# Altium PCB PCB.PcbDoc
Units mil, origin at the board's own origin, x right, y up, seen from the top; angles counter-clockwise.
Board outline 1653.54 x 1653.54 mil, 2 copper layers (Top Layer, Bottom Layer); 43 components, 40 nets, 181 pads, 31 vias.
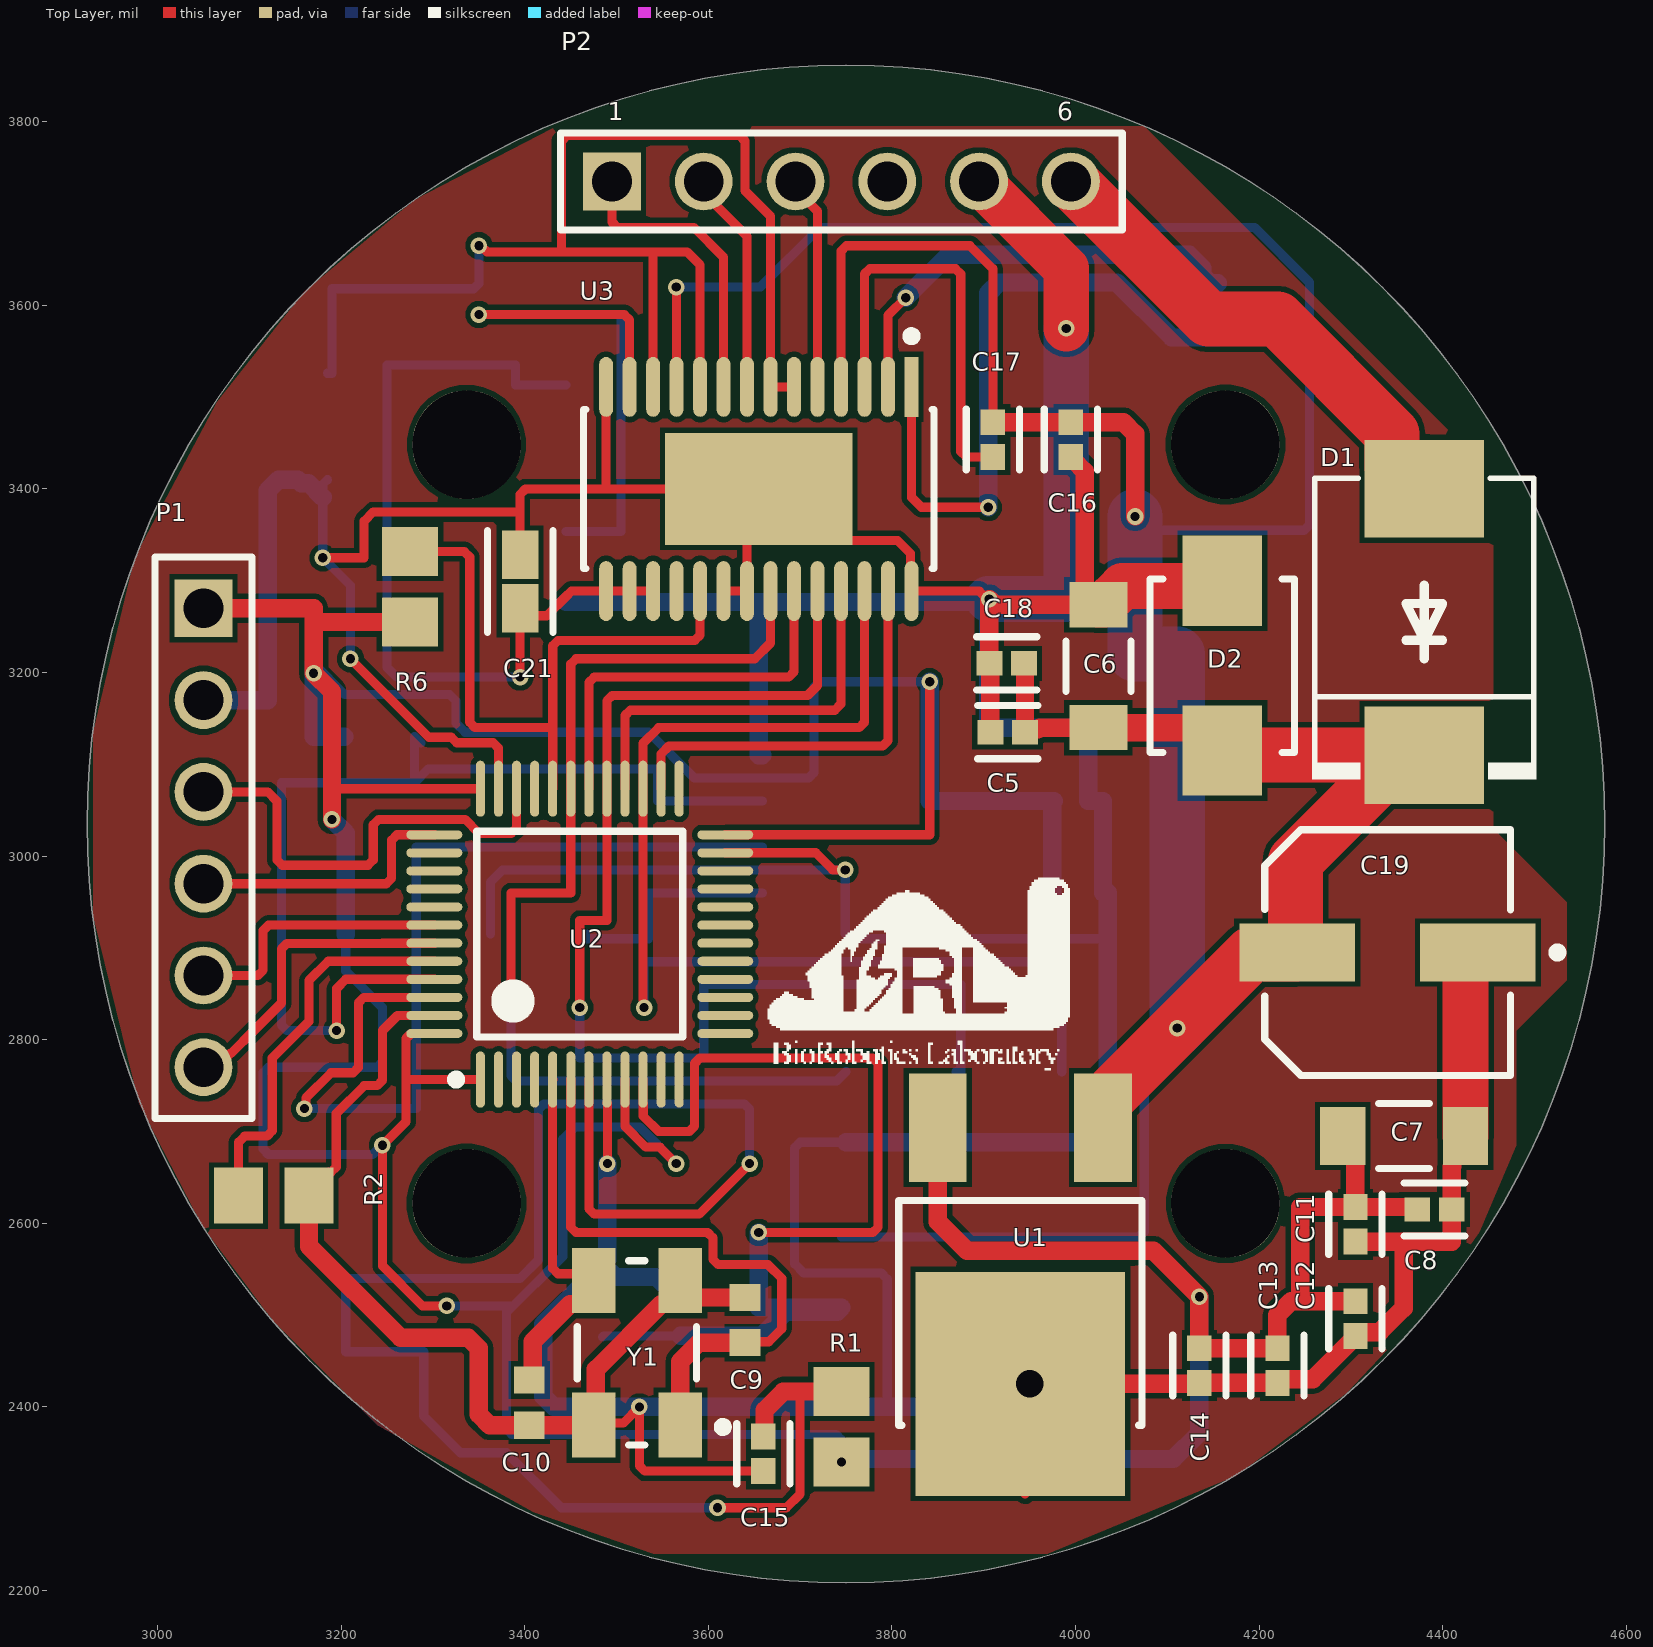
[diagram p0: Top Layer view]
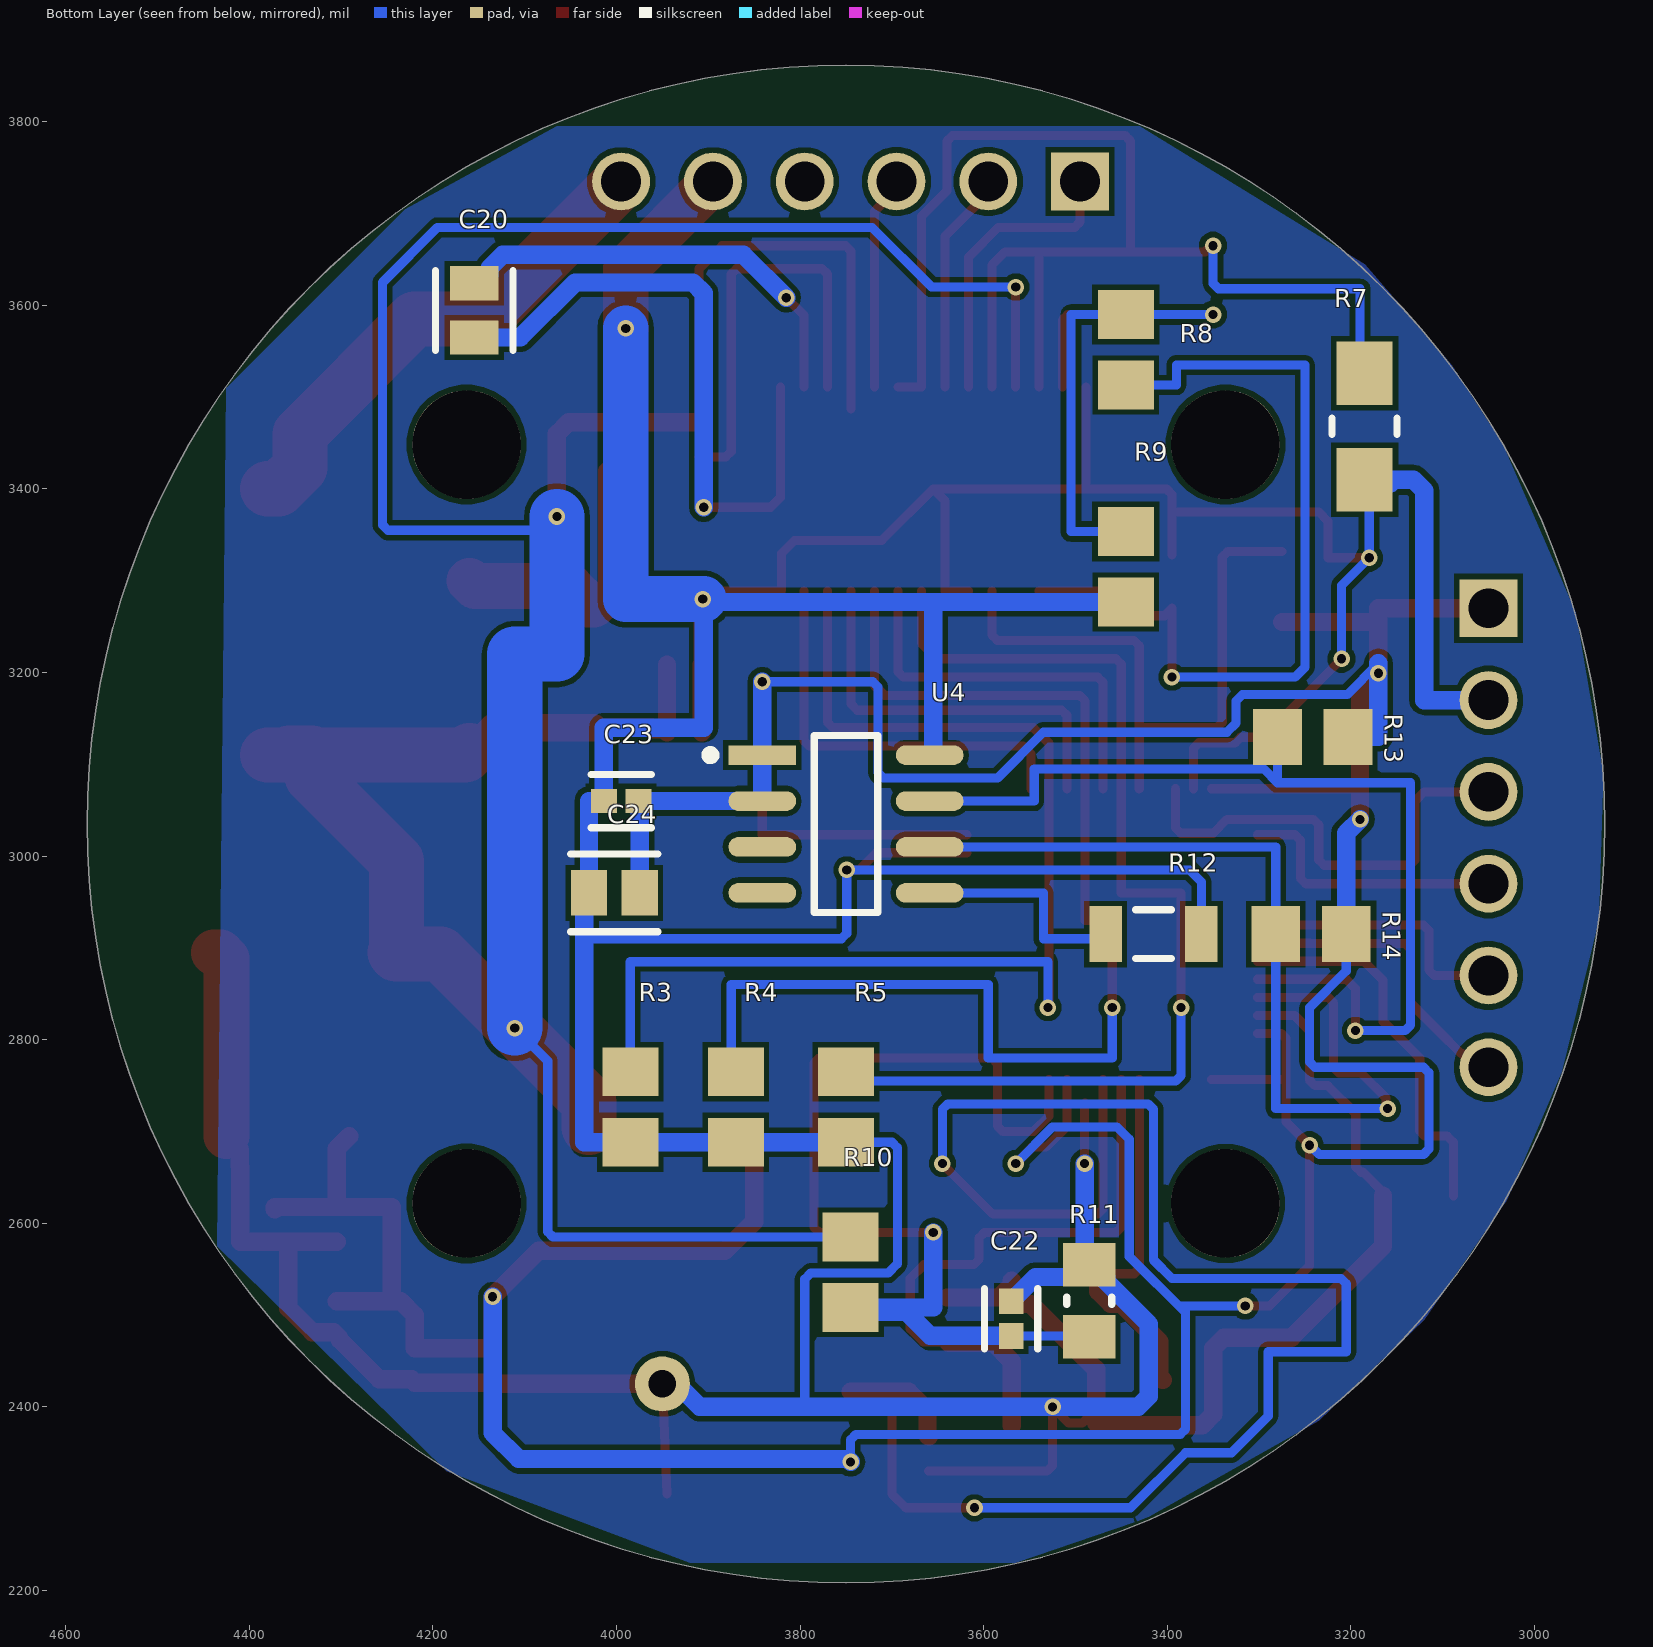
[diagram p1: Bottom Layer view, seen from below]
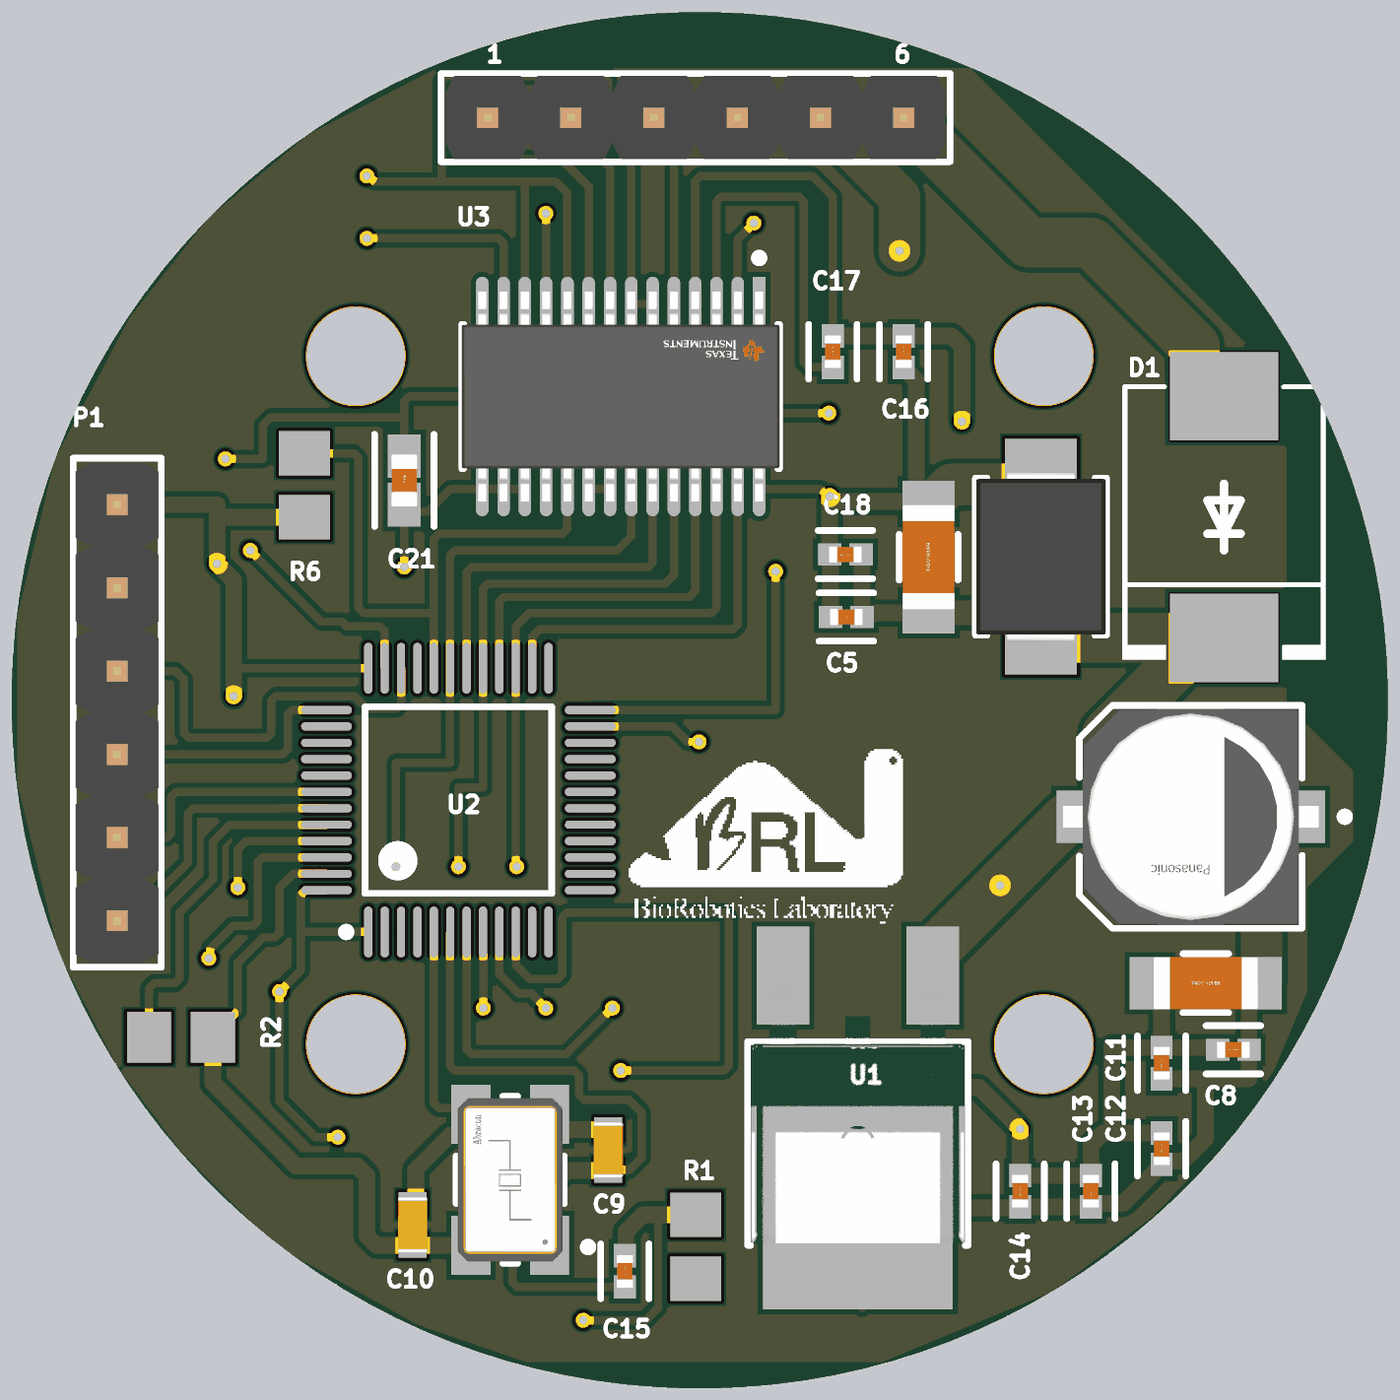
[diagram p2: 3D render of the assembled board from above, using the file's embedded part models]

## Layer stack, top to bottom
Top Solder: solder mask 0.4, Solder Resist, Dk 3.5
Top Layer: signal copper 1.4
Dielectric 1: dielectric 12.6, FR-4, Dk 4.8
Bottom Layer: signal copper 1.4
Bottom Solder: solder mask 0.4, Solder Resist, Dk 3.5

## Board outline
2923.23,3035 ccw(c3750,3035) 3750,2208.23 ccw(c3750,3035) 4576.77,3035 ccw(c3750,3035) 3750,3861.77 ccw(c3750,3035)

## Design rules (kind name [scope] priority, off if disabled: settings)
Clearance [All] p1: gap=6 ignorepadtopadclearanceinfootprint=FALSE
HoleSize [All] p1: absolutevalues=TRUE maxlimit=1000 minlimit=1 maxpercent=80.000 minpercent=20.000
HoleToHoleClearance [All] p1: gap=0 allowstackedmicrovias=TRUE
MinimumSolderMaskSliver [All] p1: minsoldermaskwidth=0
PolygonConnect [All] p1: connectstyle=Relief reliefconductorwidth=10 reliefentries=4 polygonreliefangle="90 Angle" airgapwidth=10
RoutingVias [All] p1: holewidth=28 width=50 viastyle="Through Hole" minholewidth=28 minwidth=50 maxholewidth=28 maxwidth=50
SilkToSilkClearance [All] p1: silktosilkclearance=0
SilkToSolderMaskClearance [IsPad] p1: minsilkscreentomaskgap=0 clearancetoexposedcopper=TRUE
SolderMaskExpansion [All] p1: expansion=4 istentingtop=FALSE
Width [All] p1: maxlimit=100 minlimit=5 preferedwidth=10
25 further rules are at their usual default settings.

## Classes and differential pairs
component class SENSOR: C22 C23 C24 R10 R11 R12 R13 R14 U4
component class PORT: P1 P2
component class MCU: C9 C10 C11 C12 C13 C14 C15 R1 R2 U2 Y1
component class DRIVE: C16 C17 C18 C19 C20 C21 R3 R4 R5 R6 R7 R8 R9 U3
component class POWER: C5 C6 C7 C8 D1 D2 U1

## Components (designator, comment, footprint, x,y, rotation, side; value= is the part's Value field where it differs from the comment)
C5 "100nF 35V 10%" FP-0402-L_1_0_0_05-W_0_5-IPC_A 3926.16,3135 r180 top
C6 "10uF 35V 10%" FP-1206-L_3_2_0_2-W_1_6_0-MFG 4025,3206.93 r90 top
C7 "10uF 35V 10%" FP-1206-L_3_2_0_2-W_1_6_0-MFG 4358.07,2695 r0 top
C8 "100nF 35V 10%" FP-0402-L_1_0_0_05-W_0_5-IPC_A 4391.16,2615 r0 top
C9 "20pF 50V" CAPC1608X90X30LL10T20 3640,2494.61 r270 top
C10 "20pF 50V" CAPC1608X90X30LL10T20 3405,2404.61 r90 top
C11 "100nF 35V 10%" FP-0402-L_1_0_0_05-W_0_5-IPC_A 4305,2598.84 r270 top
C12 "100nF 35V 10%" FP-0402-L_1_0_0_05-W_0_5-IPC_A 4305,2496.16 r270 top
C13 "100nF 35V 10%" FP-0402-L_1_0_0_05-W_0_5-IPC_A 4220,2445 r270 top
C14 "100nF 35V 10%" FP-0402-L_1_0_0_05-W_0_5-IPC_A 4135,2445 r270 top
C15 "100nF 35V 10%" FP-0402-L_1_0_0_05-W_0_5-IPC_A 3660,2348.84 r270 top
C16 "100nF 35V 10%" FP-0402-L_1_0_0_05-W_0_5-IPC_A 3995,3453.84 r90 top
C17 "100nF 35V 10%" FP-0402-L_1_0_0_05-W_0_5-IPC_A 3910,3453.84 r90 top
C18 "100nF 35V 10%" FP-0402-L_1_0_0_05-W_0_5-IPC_A 3925,3210 r180 top
C19 "100uF 35V 20%" FP-FTD-MFG 4340,2895 r180 top
C20 "0.01uF 50V 5%" FP-C0805C-DN-MFG 4155,3594.53 r270 bottom value="10,000 pF"
C21 "0.47uF 50V 10%" FP-C1608-080-0_1-IPC_A 3395,3299.15 r270 top
C22 "100nF 35V 10%" FP-0402-L_1_0_0_05-W_0_5-IPC_A 3570,2496.16 r90 bottom
C23 "100nF 35V 10%" FP-0402-L_1_0_0_05-W_0_5-IPC_A 3995,3060 r0 bottom
C24 "1uF 35V 10%" FP-0805-L_2_0_0_1-W_1_25-IPC_C 4002.35,2960 r0 bottom
D1 "SS54C" SMC_L6.9-W5.9-LS7.9-RD 4380,3255.13 r90 top
D2 "SMBJ40CA" FAIR-DO-214AA-A-2_V 4160,3207.52 r90 top
P1 "61300611121" 61300611121 3050,3020 r270 top locked
P2 "61300611121" 61300611121 3745,3735 r0 top locked
R1 "10k 1%" RESC2013X70X40ML20T20 3745,2378.39 r270 top
R2 "10k 1%" RESC2013X70X40ML20T20 3126.61,2630 r0 top
R3 "10k 1%" RESC2013X70X40ML20T20 3985,2726.61 r270 bottom
R4 "10k 1%" RESC2013X70X40ML20T20 3870,2726.61 r270 bottom
R5 "10k 1%" RESC2013X70X40ML20T20 3750,2726.61 r270 bottom
R6 "10k 1%" RESC2013X70X40ML20T20 3275,3293.39 r270 top
R7 "0.1 Ohm 1%" FP-ERJ8BW-MFG 3185,3468.07 r90 bottom
R8 "10k 1%" RESC2013X70X40ML20T20 3445,3551.61 r90 bottom
R9 "10k 1%" RESC2013X70X40ML20T20 3445,3315.27 r90 bottom
R10 "10k 1%" RESC2013X70X40ML20T20 3745,2546.61 r90 bottom
R11 "1k Ohm 1%" RESC2013X60X35ML10T20 3485,2515.63 r90 bottom
R12 "1k 1%" RESC3216X70X50LL05T20 3415,2915 r0 bottom
R13 "10k 1%" RESC2013X70X40ML20T20 3241.61,3130 r0 bottom
R14 "10k 1%" RESC2013X70X40ML20T20 3243.39,2915 r0 bottom
U1 "NCV4274ADT33RKG" FP-369C-MFG 3940,2534.84 r180 top
U2 "STM32F103C8T6" STM-LQFP48_L 3460,2915 r90 top
U3 "DRV8313PWPR" FP-PWP0028C-IPC_B 3655,3400 r270 top
U4 "AS5600-ASOM" FP-AS5600-ASOM-IPC_C 3750,3035 r180 bottom
Y1 "12MHZ 10PF 10PPM" FP-ABM3B-MFG 3522.24,2458.74 r90 top

## Footprints (in the part's own frame and the unit in brackets; to place one, negate y for a bottom-side part, rotate by r counter-clockwise, add the part's x,y. Pads: shape width x height; smd on the part's side, far side on the other; paste and mask are expansions set on the pad)
61300611121 [mm] "Pin Header, pitch 2.54 mm, THT, Vertical, single row, 6p"
  rect 1.6x1.6 hole 1.1: 1(-6.35,0)
  round 1.6 hole 1.1: 2(-3.81,0) 3(-1.27,0) 4(1.27,0) 5(3.81,0) 6(6.35,0)
  silkscreen extent -7.77,-1.35 7.77,1.35, body extent -7.62,-1.27 7.62,1.27, height 8.57
CAPC1608X90X30LL10T20 [mm] "Chip Capacitor, 2-Leads, Body 1.70x0.90mm, IPC High Density"
  rect 0.75x0.85 smd: 1(-0.625,0) 2(0.625,0)
  body extent -0.85,-0.45 0.85,0.45, height 0.9
FAIR-DO-214AA-A-2_V [mm] "Molded Diode, 2-Leads, Body 4.75x3.95mm"
  rect 2.5x2.2 smd: 1(-2.35,0) 2(2.35,0)
  silkscreen extent -2.4,-2 2.4,2, body extent -2.59,-1.97 2.6,1.98, height 2.65
FP-369C-MFG [mm]
  rect 1.6x3 smd paste+0 mask+0: 1(-2.285,-4.3) 3(2.285,-4.3)
  rect 5.8x6.2 smd paste+0 mask+0: 4(0,2.79)
  silkscreen extent -3.36,-2.28 3.36,3.94, body extent -3.46,-5.9 3.46,5.99, height 0.25
FP-0402-L_1_0_0_05-W_0_5-IPC_A [mil]
  rect 28.16x26.48 smd paste+0 mask+0: 1(-18.84,0) 2(18.84,0)
  silkscreen extent -33,-29 33,29, body extent -41,-21 41,21, height 10
FP-0805-L_2_0_0_1-W_1_25-IPC_C [mil]
  rect 39.68x49.69 smd paste+0 mask+0: 1(-27.64,0) 2(27.65,0)
  silkscreen extent -47,-42 47,42, body extent -39,-25 39,25, height 53
FP-1206-L_3_2_0_2-W_1_6_0-MFG [mm]
  rect 1.25x1.6 smd paste+0 mask+0: 1(-1.7,0) 2(1.7,0)
  silkscreen extent -0.7,-0.9 0.7,0.9, body extent -2.42,-1 2.42,1, height 0.25
FP-ABM3B-MFG [mm]
  rect 1.8x1.2 smd paste+0 mask+0: 1(-2,-1.2) 2(2,-1.2) 3(2,1.2) 4(-2,1.2)
  silkscreen extent -2.55,-2.5 2.55,1.65, body extent -3,-1.9 3,1.9, height 0.25
FP-AS5600-ASOM-IPC_C [mil]
  rect 73.78x21.34 smd paste+0 mask+0: 1(-91.18,75)
  rrect100% 73.78x21.34 smd paste+0 mask+0: 2(-91.18,25) 3(-91.18,-25) 4(-91.18,-75) 5(91.18,-75) 6(91.18,-25) 7(91.18,25) 8(91.18,75)
  silkscreen extent -153,-96 35,96
FP-C0805C-DN-MFG [mm]
  rect 0.95x1.35 smd paste+0 mask+0: 1(-0.75,0) 2(0.75,0)
  silkscreen extent -1.1,-1.07 1.1,1.07, body extent -1,-0.63 1,0.63, height 0.88
FP-C1608-080-0_1-IPC_A [mil]
  rect 52.4x39.85 smd paste+0 mask+0: 1(-29.15,0) 2(29.15,0)
  silkscreen extent -55,-36 55,36, body extent -75,-40 75,40, height 10
FP-ERJ8BW-MFG [mm]
  rect 1.75x1.55 smd paste+0 mask+0: 1(-1.475,0) 2(1.475,0)
  silkscreen extent -0.23,-0.9 0.23,0.9, body extent -1.6,-0.8 1.6,0.8, height 0.75
FP-FTD-MFG [mm]
  rect 3.2x1.6 smd paste+0 mask+0: 1(-2.5,0) 2(2.5,0)
  silkscreen extent -4.82,-3.4 3.4,3.4, body extent -4.35,-3.65 4.35,3.65, height 0.25
FP-PWP0028C-IPC_B [mm]
  rect 1.655x0.381 smd paste+0 mask+0: 1(-2.825,4.225)
  rrect100% 1.655x0.381 smd paste+0 mask+0: 2(-2.825,3.575) 3(-2.825,2.925) 4(-2.825,2.275) 5(-2.825,1.625) 6(-2.825,0.975) 7(-2.825,0.325) 8(-2.825,-0.325) 9(-2.825,-0.975) 10(-2.825,-1.625) 11(-2.825,-2.275) 12(-2.825,-2.925) 13(-2.825,-3.575) 14(-2.825,-4.225) 15(2.825,-4.225) 16(2.825,-3.575) 17(2.825,-2.925) 18(2.825,-2.275) 19(2.825,-1.625) 20(2.825,-0.975) 21(2.825,-0.325) 22(2.825,0.325) 23(2.825,0.975) 24(2.825,1.625) 25(2.825,2.275) 26(2.825,2.925) 27(2.825,3.575) 28(2.825,4.225)
  rect 3.1x5.18 smd paste-1000 mask+0: 29(0,0)
  silkscreen extent -4.35,-4.85 2.2,4.85, body extent -3.9,-5.1 3.9,5.1, height 0.25
RESC2013X60X35ML10T20 [mm] "Chip Resistor, 2-Leads, Body 2.1x1.35mm, IPC Low Density"
  rect 1.2x1.45 smd: 1(-1,0) 2(1,0)
  silkscreen extent -0.1,-0.63 0.1,0.63, body extent -1.05,-0.68 1.05,0.67, height 0.6
RESC2013X70X40ML20T20 [mm] "Chip Resistor, 2-Leads, Body 2.00x1.25mm, IPC Low Density"
  rect 1.35x1.55 smd: 1(-0.975,0) 2(0.975,0)
  body extent -1.1,-0.72 1.1,0.72, height 0.7
RESC3216X70X50LL05T20 [mm] "Chip Resistor, 2-Leads, Body 3.20x1.60mm, IPC High Density"
  rect 0.9x1.55 smd: 1(-1.325,0) 2(1.325,0)
  silkscreen extent -0.5,-0.67 0.5,0.67, body extent -1.63,-0.82 1.62,0.82, height 0.7
SMC_L6.9-W5.9-LS7.9-RD [mm]
  rect 2.7x3.3 smd mask+0.051: 1(-3.686,0) 2(3.686,0)
  silkscreen extent -4.36,-3.1 3.98,3.1
STM-LQFP48_L [mm] "QFP, 48-Leads, Body 7x7mm, Pitch 0.5mm, IPC High Density"
  oval 1.55x0.25 smd: 1(-4.025,2.75) 2(-4.025,2.25) 3(-4.025,1.75) 4(-4.025,1.25) 5(-4.025,0.75) 6(-4.025,0.25) 7(-4.025,-0.25) 8(-4.025,-0.75) 9(-4.025,-1.25) 10(-4.025,-1.75) 11(-4.025,-2.25) 12(-4.025,-2.75) 25(4.025,-2.75) 26(4.025,-2.25) 27(4.025,-1.75) 28(4.025,-1.25) 29(4.025,-0.75) 30(4.025,-0.25) 31(4.025,0.25) 32(4.025,0.75) 33(4.025,1.25) 34(4.025,1.75) 35(4.025,2.25) 36(4.025,2.75)
  oval 0.25x1.55 smd: 13(-2.75,-4.025) 14(-2.25,-4.025) 15(-1.75,-4.025) 16(-1.25,-4.025) 17(-0.75,-4.025) 18(-0.25,-4.025) 19(0.25,-4.025) 20(0.75,-4.025) 21(1.25,-4.025) 22(1.75,-4.025) 23(2.25,-4.025) 24(2.75,-4.025) 37(2.75,4.025) 38(2.25,4.025) 39(1.75,4.025) 40(1.25,4.025) 41(0.75,4.025) 42(0.25,4.025) 43(-0.25,4.025) 44(-0.75,4.025) 45(-1.25,4.025) 46(-1.75,4.025) 47(-2.25,4.025) 48(-2.75,4.025)
  silkscreen extent -4.15,-2.85 2.85,3.55, body extent -3.5,-3.5 3.5,3.5, height 1.6

## Part data
C5 C8 C11 C12 C13 C14 C15 C16 C17 C18 C22 C23: library part CMP-2000-06323-3, Capacitance=100nF, Case Code (Imperial)=0402, Case Code (Metric)=1005, Dielectric=X5R, Max Operating Temperature=85°C, Min Operating Temperature=-55°C, Package Quantity=1, Resistor Type=Ceramic, Tolerance=10%, Voltage=35V, Case/Package=0402, Construction=Flat, Depth=0.5mm, Halogen Free="Halogen Free", Height=0.5mm, Length=1mm, Mount="Surface Mount", Number of Pins=2, Packaging="Tape and Reel", Radiation Hardening=No, REACH SVHC="No SVHC", RoHS Compliant=Yes, Series=M, Termination=SMD/SMT, Thickness=0.022inch, Voltage Rating=35V, Voltage Rating (DC)=35V, Width=0.02inch
C6 C7: library part CMP-2000-06324-3, "None", Capacitance=10uF, Case Code (Imperial)=1206, Case Code (Metric)=3216, Dielectric=X7R, Max Operating Temperature=125°C, Min Operating Temperature=-55°C, Package Quantity=2000, Resistor Type=Ceramic, Tolerance=10%, Voltage Rating=35V, Case/Package=1206, Height=1.6mm, Length=0.126inch, Mount="Surface Mount", Packaging="Tape and Reel", REACH SVHC="No SVHC", RoHS Compliant=Yes, Series=M, Termination=SMD/SMT, Thickness=0.071inch, Voltage Rating (DC)=35V, Width=1.6mm
C9 C10: library part CMP-2000-06100-1, "Chip Capacitor, 20 pF, +/- 5%, 50 V, -55 to 85 degC, 0603 (1608 Metric), RoHS, Tape and Reel", Capacitance=20pF, Case Size/Dimension=0603, Dielectric=C0G, Manufacturer="Samsung Electro-Mechanics", Package Description="2-Pin Surface Mount Device, Body 1.60 x 0.80 mm", Rated Voltage=50V, Tolerance (%)=±5%, Datasheet URL=http://www.samsungsem.com/kr/support/product-search/mlcc/__icsFiles/afieldfile/2016/08/18/S_CL10C200JB8NNNC.pdf, Datasheet Version=06/2016, Manufacturer URL=http://www.samsungsem.com/global/index.jsp, Mounting Technology=SurfaceMount, Package Reference=0603
C19: library part CMP-05427-000027-1, "CAP ALUM 100UF 20% 35V SMD", Capacitance=100uF, Case/Package=Radial, ESR (Equivalent Series Resistance)=260mR, Leakage Current=35uA, Max Operating Temperature=105°C, Min Operating Temperature=-55°C, Package Quantity=1000, Ripple Current=300mA, Tolerance=20%, Voltage=35V, Construction=Cylindrical, Contact Plating=Tin, Diameter=6.3mm, Height=5.8mm, Height - Seated (Max)=0.24inch, Lead Diameter=0.65mm, Lead Pitch=1.8mm, Length=5.8mm, Life (Hours)=2000Hour, Mount="Surface Mount", Number of Pins=2, Packaging="Tape and Reel", Polarity=Polar, Radiation Hardening=No, REACH SVHC="No SVHC", Ripple Current (AC)=300mA, RoHS Compliant=Yes, Series=FT, Termination=SMD/SMT, Voltage Rating=35V, Voltage Rating (DC)=35V
C20: library part CMP-2007-00254-2, "CAP CER 10000PF 50V X7R 0805", Capacitance="10,000 pF", Manufacturer=KEMET, Manufacturer Part Number=C0805C103J5RACTU, Package=C0805C-DN, Temperature="-55°C to +125°C", Temperature Characteristic=X7R, Temperature Coefficient=30ppm/°C, Temperature Range High=+125°C, Temperature Range Low=-55°C, Tolerance=0.05, Voltage Rating="50 V", Automotive=No, Category=Cap, ComponentLink2Description=Datasheet, ComponentLink2URL=https://content.kemet.com/datasheets/KEM_C1003_C0G_SMD.pdf, Device Class L1="Passive Components", Device Class L2=Capacitors, Device Class L3="Ceramic Capacitors", Digikey Description="CAP CER 10000PF 50V X7R 0805", Height=0.88mm, Ipc Land Pattern Name=CAPC200125X78, Lead Free=Yes, Material=Ceramic, Mouser Description="Capacitor; Ceramic; Cap 0.01uF; Tol 5%; Vol-Rtg 50 V; SMT; Case 0805; X7R; TR", Octopart=https://octopart.com/c0805c103j5ractu-kemet-133473, RoHS=TRUE
C21: library part CMP-08246-003628-1, "Multilayer Ceramic Capacitors 470nF ±10% 50V X7R SMD 0603", Capacitance=470nF, Case Code (Imperial)=0603, Case Code (Metric)=1608, Dielectric=X7R, Dielectric Material=Ceramic, Max Operating Temperature=125°C, Min Operating Temperature=-55°C, Package Quantity=4000, Tolerance=10%, Voltage=50V, Case/Package=0603, Construction=Flat, Depth=0.8mm, Height=0.8mm, Lead Free="Lead Free", Length=1.6mm, Mount="Surface Mount", Packaging="Cut Tape", Radiation Hardening=No, REACH SVHC="No SVHC", Resistor Type=Ceramic, RoHS Compliant=Yes, Series=C, Termination=SMD/SMT, Thickness=0.037inch, Voltage Rating=50V, Voltage Rating (DC)=50V, Weight=7.1E-05oz, Width=0.031inch
C24: library part CMP-14477-004038-2, "Multilayer Ceramic Capacitor 1 uF 35V X7R 10% SMD 0805 T/R", Capacitance=1uF, Case Code (Imperial)=0805, Case Code (Metric)=2012, Dielectric=X7R, Max Operating Temperature=125°C, Min Operating Temperature=-55°C, Package Quantity=1, Tolerance=10%, Voltage=35V, Case/Package=0805, Construction=Flat, Contact Plating=Nickel, Depth=1.25mm, Halogen Free="Halogen Free", Height=1.25mm, Lead Free="Lead Free", Length=2mm, Mount="Surface Mount", Number of Pins=2, Packaging="Tape and Reel", Radiation Hardening=No, RoHS Compliant=Yes, Series=M, Termination=SMD/SMT, Thickness=0.053inch, Voltage Rating=35V, Voltage Rating (DC)=35V, Width=0.049inch
D1: library part SS54C_C880739, "二极管配置:-;直流反向耐压(Vr):40V;平均整流电流(Io):5A;正向压降(Vf):550mV@5A;反向电流(Ir):500A@40V;", Average Rectified Current (Io)=5A, Forward Voltage (Vf@If)=550mV@5A, JLCPCB Part Class=扩展库, LCSC Part Name="40V 5A 550mV@5A", Manufacturer=Slkor(萨科微), Reverse Leakage Current (Ir)=500A@40V, Reverse Voltage (Vr)=40V, Add into BOM=yes, Convert to PCB=yes, Datasheet=https://atta.szlcsc.com/upload/public/pdf/source/20201013/C880739_D47B31F19BD092A88A6CE51787FFA2A3.pdf, Device=SS54C_C880739, Diode Configuration=-, Manufacturer Part=SS54C, Supplier=LCSC, Supplier Footprint=SMC(DO-214AB), Supplier Part=C880739, Symbol=SS54C_C880739
D2: library part CMP-2000-07097-1, "Transient Voltage Suppressor, 600 W, 40 V, -55 to 150 degC, 2-Pin SMD, RoHS, Tape and Reel", Breakdown Voltage-Max=49.1V, Breakdown Voltage-Min=44.4V, Clamping Voltage-Max=64.5V, Manufacturer="Fairchild Semiconductor", Package Description="2-Pin Surface Mount Device, Body 4.4 x 3.625 mm", Package Reference=DO-214AA, Power Dissipation=600W, Datasheet URL=https://www.fairchildsemi.com/datasheets/SM/SMBJ40CA.pdf, Datasheet Version="Rev. 1.1.1, 11/2014", Directional=Bi-Directional, Manufacturer URL=https://www.fairchildsemi.com/, Mounting Technology=SurfaceMount
P1 P2: library part CMP-1502-01070-1, "THT Vertical Pin Header WR-PHD, Pitch 2.54 mm, Single Row, 6 pins", Contact Resistance=20mOhm, Manufacturer="Wurth Elektronik", Operating Temperature=-40to105degC, Rated Current=3A, Withstanding Voltage=500VAC, Working Voltage=250VAC, Datasheet URL=https://katalog.we-online.de/em/datasheet/6130xx11121.pdf, Gender=Male, Manufacturer URL=http://www.we-online.de, Mounting Technology=THT, Orientation=Vertical, Package Reference=61300611121, Packaging=Bag, Part Number=61300611121, Pin Number=6, Pitch=2.54mm, Publisher=WurthElektronik, Row Number=Single
R1 R2 R3 R4 R5 R6 R8 R9 R10 R13 R14: library part CMP-2001-04376-1, Manufacturer=Panasonic, Part Number=ERJ-6ENF1002V
R7: library part CMP-2003-00785-2, "RES 0.1 OHM 1% 1W 1206", Case Code (Imperial)=1206, Case Code (Metric)=3216, Max Operating Temperature=155°C, Max Power Dissipation=1W, Min Operating Temperature=-55°C, Package Quantity=1, Resistance=100mR, Resistance Tolerance=1%, Resistor Type="Thick Film", Temperature Coefficient=100ppm/°C, Case/Package=1206, Construction=Rectangular, Contact Plating=Tin, Depth=1.6mm, Features="Automotive AEC-Q200", Height=0.65mm, Lead Free="Lead Free", Length=3.2mm, Military Standard=Not, Mount="Surface Mount", Number of Pins=2, Number of Terminations=2, Packaging="Tape and Reel", Power Rating=1W, Radiation Hardening=No, REACH SVHC="No SVHC", RoHS Compliant=Yes, Series=ERJ, Size Code=1206, Technology="THICK FILM", Termination=SMD/SMT, Tolerance=1%, Width=0.063inch
R11: library part CMP-2100-03671-1, "Chip Resistor, 1 KOhm, +/- 1%, 125 mW, -55 to 155 degC, 0805 (2012 Metric), RoHS, Tape and Reel", Case Code (Imperial)=0805, Case Code (Metric)=2012, Manufacturer=Yageo, Max Operating Temperature=155degC, Max Power Dissipation=125mW, Min Operating Temperature=-55degC, Package Description="2-Pin Surface Mounted Device, Body 2 x 1.25 mm", Package Quantity=1, Resistance=1KOhm, Temperature Coefficient=100ppm/degreesC, Tolerance=1%, Voltage Rating=150V, Case/Package=0805, Composition=ThickFilm, Datasheet URL=http://www.yageo.com/NewPortal/yageodocoutput?fileName=/pdf/R-Chip/PYu-RC_Group_51_RoHS_L_5.pdf, Datasheet Version="Rev. 5, 10/2016", Depth=1.25mm, Height=0.024inch, Lead Free=LeadFree, Length=0.079inch, Manufacturer URL=http://www.yageo.com/, Military Standard=Not, Number of Pins=2, Number of Terminations=2, Package Reference=0805, Packaging=TapeandReel, Power Rating=125mW, REACH SVHC=Unknown, RoHSCompliant=true, Termination=SMD/SMT, Voltage Rating (DC)=150V, Width=0.049inch
R12: library part CMP-2003-00017-1, Manufacturer=Panasonic, Part Number=ERJ-8ENF1001V
U1: library part CMP-07128-000011-1, "IC REG LINEAR 3.3V 400MA DPAK", Dropout Voltage=1.27V, Manufacturer="ON SEMICONDUCTOR", Max Junction Temp=+150°C, Max Supply Voltage=+45V, Min Supply Voltage=-42V, Nominal Supply Current=145-30000uA, Output Current=400mA, Output Voltage=3.3V, Package=369C, Temperature="-40°C to +150°C", Temperature Range Low=-40°C, Accuracy Percentage=2%, Automotive=Yes, Automotive Grade="Grade 0", Category=IC, ComponentLink2Description=Datasheet, ComponentLink2URL=https://www.onsemi.com/pub/Collateral/NCV4274-D.PDF, Device Class L1="Integrated Circuits (ICs)", Device Class L2="Power Management ICs", Device Class L3="Voltage Regulators - Linear", Digikey Description="IC REG LINEAR 3.3V 400MA DPAK", Footprint Url=https://www.onsemi.com/pub/Collateral/369C.PDF, Height=2.51mm, Lead Free=Yes, Manufacturer Part Number=NCV4274ADT33RKG, Mouser Description="IC REG LINEAR 3.3V 400MA DPAK-3", Number Of Outputs=1, Octopart=https://octopart.com/ncv4274adt33rkg-on+semiconductor-10550992, Output Type=Fixed, RoHS=TRUE, Standoff Height=0mm, Temperature Range High=+150°C
U2: library part CMP-0237-00215-3, "ARM Cortex-M3 32-bit MCU, 64 KB Flash, 20 KB Internal RAM, 37 I/Os, 48-pin LQFP, -40 to 85 degC, Tray", I/Os (High Current)=37, Operating Frequency(F) (Processor speed) (MHz)=72, Supply Voltage(Vcc) min (V)=2, A/D Converter="2x12-bit (10 Channel)", ComponentLink1Description="Manufacturer URL", ComponentLink1URL=http://www.st.com/web/en/home.html, ComponentLink2Description=Datasheet, ComponentLink2URL=http://www.st.com/st-web-ui/static/active/en/resource/technical/document/datasheet/CD00161566.pdf, ComponentLink3Description="Package Specification", ComponentLink3URL=http://www.st.com/st-web-ui/static/active/en/resource/technical/document/datasheet/DM00058181.pdf, Core="ARM Cortex-M3", DatasheetVersion="Rev. 16", FLASH Size (Prog) (kB)=64, Internal RAM Size (kB)=20, Mounting Technology="Surface Mount", PackageDescription="48-Pin Low Profile Quad Flat Package, 7 x 7 mm Body, 0.5 mm Pitch", PackageReference=LQFP48, PackageVersion="Rev. 6, 06/2013", Packing=Tray, PartNumber=STM32F103C8T6
U3: library part CMP-04915-000025-1, "IC MOTOR DRIVER 8V-60V 28HTSSOP", Case/Package=HTSSOP, Max Operating Temperature=125°C, Max Supply Voltage=60V, Min Operating Temperature=-40°C, Min Supply Voltage=8V, Output Current=1.75A, Package Quantity=2000, Interface=Parallel, Lead Free="Lead Free", Logic Function="AND GATE", Mount="Surface Mount", Number Of Outputs=1, Number of Pins=28, Packaging="Tape and Reel", Series=-
U4: library part CMP-22826-000002-1, "SENSOR ANGLE 360DEG SMD", Max Operating Temperature=125°C, Min Operating Temperature=-40°C, Lead Free="Lead Free", Mount="Surface Mount", Sensing Method="Hall Effect", Termination=SMD/SMT
Y1: library part CMP-27762-011386-1, "Crystal 12MHz ±10ppm 10pF SMD-4 5mm x 3.2mm", Case/Package=CSMD, ESR (Equivalent Series Resistance)=70R, Frequency=12MHz, Frequency Stability=10ppm, Load Capacitance=10pF, Max Operating Temperature=60°C, Min Operating Temperature=-10°C, Operating Frequency="12 MHz", Package Quantity=1000, Resistor Type=Ceramic, Depth=3.2mm, Frequency Tolerance=10ppm, Height=0.043inch, Lead Free="Lead Free", Length=5mm, Mount="Surface Mount", Number of Pins=4, Packaging="Tape and Reel", REACH SVHC="No SVHC", Series=ABM3B, Series Resistance=70R, Termination=SMD/SMT, Tolerance=10ppm, Width=0.126inch

## Free pads (board coordinates)
  round 118.11 hole 118.11: 1(3336.61,2621.61) 1(3336.61,3448.39) 1(4163.39,2621.61) 1(4163.39,3448.39)
  round 60 hole 30: 28(3950,2425)

## Via types
v1: diameter 18, hole 10, Top Layer to Bottom Layer, 31 vias

## Nets (pads, with @x,y where several pads share a name; then routed paths per layer and width w, separated by ;. In a path a pad name is that pad's centre, name@x,y a point inside that pad or via, vN(x,y) a via of type N, cw(c..) or ccw(c..) an arc to the next point about the centre after c; other vN are vias at no path point)
BOOT: R2.1 U2.44 | length 425.7
  Top Layer w10: R2.1 3088.23,2688.23 3095,2695 3119.14,2695 3125,2700.86 3125,2780 3165,2820 3165,2864.61 3185.86,2885.47 U2.44
COMPN: R8.2 R9.2 U3.13 | length 690.9
  Top Layer w10: v1(3350,3590) 3508.39,3590 3514.25,3584.14 U3.13
  Bottom Layer w10: v1(3350,3590) R8.2 3505,3590 3505,3353.65 R9.2
COMPO: R6.1 U2.32 U3.19 | length 709.4
  Top Layer w10: R6.1 3334.14,3331.77 3340,3325.91 3340,3145.86 3345.86,3140 3430.47,3140 ; U2.32 3430.47,3140 ; U3.19 3591.02,3240.86 3585.17,3235 3436.33,3235 3430.47,3229.14 3430.47,3140
COMPP: R7.2 U3.6 U3.7 U3.10 U3.12 | length 1460.7
  Top Layer w10: v1(3350,3665) 3352.16,3665 3358.88,3658.29 3440,3658.29 ; U3.12 3539.84,3658.29 ; U3.10 3591.02,3643.98 3576.71,3658.29 3539.84,3658.29 ; U3.6 U3.7 3667.8,3697.2 3640,3725 3640,3779.14 3634.14,3785 3445.86,3785 3440,3779.14 3440,3658.29 ; 3440,3658.29 3539.84,3658.29
  Bottom Layer w10: R7.2 3190,3526.14 3190,3618.07 3344.14,3618.07 3350,3623.93 v1(3350,3665)
EN1: R3.1 U2.27 U3.26 | length 1306.7
  Top Layer w10: v1(3530,2835) 3528.9,2845 3528.9,3123.04 3545.86,3140 3764.3,3140 3770.16,3145.86 U3.26
  Bottom Layer w10: v1(3530,2835) 3530,2885 3985,2885 R3.1
EN2: R4.1 U2.29 U3.24 | length 1352.9
  Top Layer w10: v1(3460,2835) 3460,2930 3489.53,2930 U2.29 3489.53,3169.14 3495.39,3175 3708.12,3175 3718.98,3185.86 U3.24
  Bottom Layer w10: v1(3460,2835) 3460,2780 3595,2780 3595,2860 3875,2860 3875,2765 R4.1
EN3: R5.1 U2.31 U3.22 | length 1168.8
  Top Layer w10: v1(3385,2835) 3385,2960 3450.16,2960 U2.31 3450.16,3209.14 3456.02,3215 3650.59,3215 3667.8,3232.2 U3.22
  Bottom Layer w10: v1(3385,2835) 3385,2760.86 3390.86,2755 3740,2755 R5.1
GND: C5.2 C6.2 C7.2 C8.2 C9.1 C10.1 C11.2 C12.2 C13.2 C14.2 C15.2 C16.1 C18.2 C19.1 C21.1 C22.2 C23.2 C24.2 D2.2 P1.2 P2.5 pad.28 R2.2 R3.2 R4.2 R5.2 R7.1 R9.1 R11.2 R12.1 U1.4 U2.8 U2.23 U2.35 U2.47 U3.14 U3.20 U3.21 U3.28 U3.29 U4.8 Y1.2 Y1.4 | length 9529.8
  Top Layer w10: R2.2 3165,2633.94 3186.57,2655.51 3188.77,2655.51 3194.63,2661.37 3194.63,2719.63 3225,2750 3239.14,2750 3245,2755.86 3245,2810 3261.42,2826.42 U2.47 ; v1(3180,3325) 3225,3325 3225,3365 3235,3375 3395,3375 ; v1(3210,3215) 3295.56,3129.44 3320,3129.44 3325.86,3123.58 3365.56,3123.58 3371.42,3117.72 U2.35 ; C21.1 3395,3375 ; Y1.4@3485,2390 3492.76,2382.24 3507.24,2382.24 v1(3525,2400) 3525,2335.86 3530.86,2330 C15.2 ; U3.14 3488.66,3400 ; U2.8@3489.61,2731.02 3490,2730.63 v1(3490,2665) ; U3.20 U3.21 3642.2,3387.2 U3.29 ; U2.23 3717.03,3003.58 3735.61,2985 v1(3749.14,2985) ; v1(3906.16,3280) 3903.99,3280 3895.23,3288.76 U3.28 3820.38,3289.72 3820.38,3329.62 3806.02,3343.98 3711.02,3343.98 U3.29 ; U1.4@3945,2305 3949.98,2424.58 pad.28 ; 3395,3375 3395,3394.14 3400.86,3400 3488.66,3400 ; 3488.66,3400 U3.29
  Top Layer w20: R2.2 3165,2575 3264.61,2475.39 3338.28,2475.39 3350,2463.68 3350,2391.72 3361.72,2380 C10.1 Y1.4 3477.54,2382.54 3477.54,2440.88 3548.7,2512.05 3555.87,2512.05 3569.49,2525.67 Y1.2@3569.49,2532.83 ; Y1.2 Y1.2@3569.49,2532.83 ; C9.1 3583.11,2519.21 Y1.2@3569.49,2532.83 ; C18.2 v1(3906.16,3280) 3912.3,3273.86 C6.2 ; C5.2 C18.2@3907.32,3208.84 ; pad.28 C14.2@4133.84,2425 ; C16.1 3995,3434.16 C16.1@3998.24,3430.92 ; C16.1@3998.28,3430.92 4010,3419.2 C6.2@4010,3280 ; C14.2 C13.2 4220,2427 4223.24,2430.24 4258.77,2430.24 4301.76,2473.24 4301.76,2474.92 4308.24,2481.4 4331.4,2481.4 4357.5,2507.5 4357.5,2580 ; C11.2 4357.5,2580 ; C7.2 4410.39,2680.39 4410.39,2662.18 4410,2661.79 C8.2 4410,2580 4357.5,2580
  Top Layer w50: P2.5 3990,3640 v1(3990,3575) ; C6.2 4031.1,3273.86 4051.38,3294.13 4154.09,3294.13 D2.2 ; C7.2 4425,2888.5 4431.5,2895 C19.1
  Bottom Layer w10: R7.1 3180,3405 3180,3390.87 v1(3180,3325) 3210,3295 v1(3210,3215) ; R12.1 3362.83,2971.98 3375.86,2985 v1(3749.14,2985) 3749.14,2915.86 3755,2910 4032.5,2910 4035,2912.5 ; C22.2 C22.2@3570,2515.84 ; R5.2 3699.86,2688.23 3694,2682.37 3694,2555.86 3704.05,2545.8 3788.34,2545.8 3795,2539.14 3795,2400
  Bottom Layer w20: P1.2 3120,3170 3120,3398.28 3131.72,3410 3152.77,3410 3156.39,3406.38 3164.49,3406.38 R7.1@3180,3390.87 ; R9.1 3655,3276.88 ; v1(3490,2665) 3490,2560 R11.2 ; C22.2@3570,2515.84 3566.76,2519.08 3565.92,2519.08 3543.54,2541.46 3498.54,2541.46 R11.2 ; U4.8 3655,3110 3655,3276.88 ; R5.2 R4.2 R3.2 4035,2688.23 4035,2912.5 4035,2960 C24.2 4030,3060 C23.2 4013.84,3140 3905,3140 v1@3905,3276.88 ; v1@3905,3280 v1@3905,3276.88 ; pad.28 3934.18,2425 3909.18,2400 3795,2400 v1(3525,2400) 3431.72,2400 3420,2411.72 3420,2490 3466.46,2536.46 3466.46,2541.38 3480.08,2555 R11.2 ; 3655,3276.88 v1@3905,3276.88
  Bottom Layer w50: v1@3905,3280 v1(3906.16,3280) 3990,3280 v1(3990,3575)
IN1: U2.26 U3.27 | length 454
  Top Layer w10: U2.26 3548.58,3111.42 3557.17,3120 3789.89,3120 3795.75,3125.86 U3.27
IN2: U2.28 U3.25 | length 443.2
  Top Layer w10: U2.28 3509.21,3153.14 3515.07,3159 3737.71,3159 3744.57,3165.86 U3.25
IN3: U2.30 U3.23 | length 432
  Top Layer w10: U2.30 3469.84,3189.14 3475.7,3195 3687.53,3195 3693.39,3200.86 U3.23
IN_AM: U2.15
IN_AP: U2.14
IN_BM: U2.13
IN_BP: U2.12
MT6816_CS: U2.38
NetC20_1: C20.1 U3.2 | length 481.9
  Top Layer w10: U3.2 3795.75,3589.14 v1(3815,3608.39)
  Bottom Layer w20: v1(3815,3608.39) 3861.61,3655 4124.06,3655 4138.43,3640.63 4138.43,3632.76 4147.13,3624.06 C20.1
NetC20_2: C20.2 U3.1 | length 721.5
  Top Layer w10: U3.1 3821.34,3390.86 3832.2,3380 v1(3905,3380)
  Bottom Layer w20: v1(3905,3380) 3905,3613.28 3916.72,3625 4045,3625 4105,3565 C20.2
NetR12_2: R12.2 U4.5 | length 246.7
  Bottom Layer w10: R12.2 3467.17,2910 3535,2910 3535,2960 U4.5
NRST: C15.1 R1.1 U2.7 | length 1937.3
  Top Layer w10: U2.7 3469.84,2615.86 3475.7,2610 3590,2610 v1(3645,2665) ; v1(3610,2290) 3685,2290 3700,2305 3700,2414.27
  Top Layer w20: C15.1 3661.21,2368.9 3661.21,2396.21 3681.77,2416.77 3702.5,2416.77 R1.1
  Bottom Layer w10: v1(3610,2290) 3440,2290 3380,2350 3330,2350 3290,2390 3290,2460 3205,2460 3205,2534.14 3210.86,2540 3395,2540 3415,2560 3415,2724.14 3420.86,2730 3639.14,2730 3645,2724.14 v1(3645,2665)
OSC_IN: C10.2 U2.5 Y1.3 | length 400
  Top Layer w10: U2.5 3430.39,2756.46 3430.39,2550.86 3436.25,2545 3467.48,2545 Y1.3
  Top Layer w20: C10.2 3408.73,2432.95 3408.73,2471.21 3449.57,2512.05 3461.38,2512.05 3475,2525.67 Y1.3
OSC_OUT: C9.2 U2.6 Y1.1 | length 675
  Top Layer w10: U2.6 3450.16,2595.86 3456.02,2590 3599.14,2590 3605,2584.14 3605,2560.86 3610.86,2555 3665,2555 3680,2540 3680,2485 3665.87,2470.87 3640.87,2470.87 C9.2
  Top Layer w20: Y1.1 3569.49,2449.49 3590,2470 C9.2@3638.03,2470
OUT1: P2.3 U3.5 | length 233.7
  Top Layer w10: P2.3 3695,3726.62 3718.98,3702.65 U3.5
OUT2: P2.2 U3.8 | length 243.3
  Top Layer w10: P2.2 3595,3722.47 3642.2,3675.27 U3.8
OUT3: P2.1 U3.9 | length 322.9
  Top Layer w10: P2.1 3495,3690.86 3500.86,3685 3584.14,3685 3616.61,3652.53 U3.9
POWER_U: C22.1 R10.1 R11.1 U2.10 | length 1134
  Top Layer w10: U2.10 3528.9,2731.1 3529.14,2730.86 3529.14,2716.72 3545.86,2700 3579.14,2700 3585,2705.86 3585,2774.14 3590.86,2780 3779.14,2780 3785,2774.14 3785,2595.86 3779.14,2590 v1(3655,2590)
  Bottom Layer w10: R11.1 3486.06,2477.32 C22.1
  Bottom Layer w20: C22.1 3658.03,2477.32 3684.49,2503.78 3740.55,2503.78 R10.1 3655,2508.23 v1(3655,2590)
SCL: R13.2 U2.45 U4.7 | length 1107.4
  Top Layer w10: v1(3195,2810) 3195,2855.79 3205,2865.79 U2.45
  Bottom Layer w10: v1(3195,2810) 3140.86,2810 3135,2815.86 3135,3080 3280,3080 ; R13.2@3286.61,3123.39 R13.2 3280,3080 ; U4.7 3545,3060 3545,3095 3295,3095 3280,3080
SDA: R14.2 U2.46 U4.6 | length 1022.6
  Top Layer w10: v1(3160,2725) 3161.53,2726.53 3161.53,2736.53 3189,2764 3213.04,2764 3218.9,2769.86 3218.9,2840.24 3224.76,2846.1 U2.46
  Bottom Layer w10: v1(3160,2725) 3281.77,2725 R14.2 3281.77,3010 U4.6
SPI_MISO: U2.40
SPI_MOSI: U2.41
SPI_SCK: U2.39
SWCLK: P1.4 U2.37 | length 297.9
  Top Layer w10: P1.4 3249.14,2970 3255,2975.86 3255,3017.41 3260.86,3023.27 U2.37
SWDIO: P1.3 U2.34 | length 506.2
  Top Layer w10: P1.3 3120,3070 3130,3060 3130,2995.86 3135.86,2990 3229.14,2990 3235,2995.86 3235,3034.14 3240.86,3040 3335,3040 3350,3025 3385.24,3025 3391.1,3030.86 U2.34
UART_RX: P1.6 U2.43 | length 342.1
  Top Layer w10: P1.6 3064.34,2770 3079.72,2785.38 3080.38,2785.38 3105,2810 3135,2840 3135,2898.98 3140.86,2904.84 3244.53,2904.84 3244.84,2905.16 U2.43
UART_TX: P1.5 U2.42 | length 299.5
  Top Layer w10: P1.5 3109.14,2870 3115,2875.86 3115,2918.98 3120.86,2924.84 U2.42
V3P3: C21.2 R8.1 U3.15 U3.16 U3.17 | length 929.7
  Top Layer w10: v1(3395,3195) C21.2 3403.03,3261.97 3424.07,3261.97 3445,3282.91 3450.86,3288.76 U3.15 U3.16 U3.17
  Bottom Layer w10: v1(3395,3195) 3260.86,3195 3250,3205.86 3250,3535 3390,3535 3390,3513.23 R8.1
VCC_3V3: C7.1 C8.1 C11.1 C12.1 C13.1 C14.1 C23.1 C24.1 P1.1 R1.2 R6.2 R13.1 R14.1 U1.3 U2.1 U2.9 U2.24 U2.36 U2.48 U4.1 U4.2 | length 6071.3
  Top Layer w10: 3190,3073.46 U2.36 ; U2.48 3276.1,2806.73 3270.68,2801.31 3270.68,2756.54 ; v1(3315,2510) 3288.53,2510 3245,2553.53 v1(3245,2685) 3270.68,2710.68 3270.68,2756.54 ; U2.1 3270.68,2756.54 ; U2.9 3509.21,2705.79 3531.99,2683.01 3546.99,2683.01 v1(3565,2665) ; U2.24 3841.18,3023.27 v1(3841.18,3190)
  Top Layer w20: P1.1 3170,3270 3170,3255 ; v1(3190,3040) 3190,3073.46 3190,3179.18 v1(3170,3199.18) 3170,3255 ; R6.2 3170,3255 ; U1.3 3850.04,2601.72 3881.76,2570 4085,2570 v1(4135,2520) C14.1 C13.1 4220,2500 4235,2515 4245,2515 ; C7.1 4305,2681.14 C11.1 ; C12.1 4245,2515 ; C8.1 4372.32,2617.68 C11.1 ; 4245,2515 4245,2617.68 C11.1
  Bottom Layer w10: 3170,3210 3204,3176 3318.14,3176 3325,3169.14 3325,3145 3335,3135 3535,3135 3585,3085 3709.14,3085 3715,3090.86 3715,3184.14 3720.86,3190 v1(3841.18,3190) ; R14.1 3205,2875 3245,2835 3245,2775.86 3239.14,2770 3120.86,2770 3115,2764.14 3115,2680.86 3120.86,2675 3234.22,2675 v1@3245,2685.78 ; v1(3315,2510) 3380,2510 3385,2510 3380,2505 3380,2375.86 3385.86,2370 3739.14,2370 3745,2364.14 v1(3745,2340) ; 3380,2502.37 3441.46,2563.84 3441.46,2691.46 3455,2705 3525,2705 v1(3565,2665)
  Bottom Layer w20: 3170,3210 v1(3170,3199.18) 3170,3130 R13.1 ; v1(3190,3040) 3205,3025 R14.1 ; v1(3745,2340) 3748.14,2343.14 4106.43,2343.14 4135,2371.72 v1(4135,2520) ; v1(3841.18,3190) U4.1 U4.2 C23.1@3974.71,3060 ; C24.1 C23.1@3974.71,3060 ; C23.1 C23.1@3974.71,3060
VCC_IN: D1.2 P2.6 | length 545.1
  Top Layer w60: P2.6 4145,3585 4220,3585 4345.04,3459.96 4345.04,3423.41 4368.19,3400.26 D1.2
VCP: C17.1 U3.3 | length 463.3
  Top Layer w10: U3.3 3770.16,3634.14 3776.02,3640 3869.14,3640 3875,3634.14 3875,3440.86 3880.86,3435 C17.1
VM4: C5.1 C6.1 C16.2 C17.2 C18.1 C19.2 D1.1 D2.1 R10.2 U1.1 U3.4 U3.11 | length 4339.6
  Top Layer w10: v1(3565,3620) 3565.22,3619.78 3565.22,3511.45 U3.11 ; U3.4@3744.57,3487.49 U3.4 3744.57,3659.14 3750.42,3665 3885,3665 3910,3640 C17.2
  Top Layer w20: C17.2 C16.2 4052.32,3472.68 4065,3460 v1(4065,3370) ; C18.1@3945,3208.84 C5.1 3948.24,3138.24 3959.04,3138.24 3960.8,3140 C6.1
  Top Layer w30: C6.1 4135,3140 D2.1
  Top Layer w60: U1.1 4029.96,2731.69 4191.77,2893.5 4240.08,2893.5 C19.2 4240.08,2896.5 4239.54,2896.5 4239.54,2994.54 D1.1@4331.85,3086.85 ; D2.1 4165,3110 D1.1 ; D1.1@4331.85,3112.5 D1.1@4356.85,3112.5
  Bottom Layer w10: v1(3565,3620) 3656.76,3620 3721.76,3685 4195,3685 4255,3625 4255,3360.86 4249.14,3355 4080,3355 v1(4065,3370) ; R10.2 4069.14,2585 4075,2590.86 4075,2776.73 v1(4110.87,2812.6)
  Bottom Layer w60: v1(4065,3370) 4065,3220 4110.87,3220 v1(4110.87,2812.6)
pads on no net: P2.4 U2.2 U2.3 U2.4 U2.11 U2.16 U2.17 U2.18 U2.19 U2.20 U2.21 U2.22 U2.25 U2.33 U3.18 U4.3 U4.4

## Polygon pours and split planes (outlines as drawn)
no net on Top Layer "NONET_L01_P000" (solid, pour order 0): 4075,3795 4410,3460 4455,3460 4455,3030 4535,2950 4535,2865 4480,2810 4480,2685 4440,2590 4380,2505 4295,2415 4175,2325 3970,2240 3540,2240 3410,2285 3240,2380 3125,2495 3050,2595 2980,2730 2930,2935 2930,3135 2975,3325 3065,3495 3160,3615 3280,3715 3435,3795
no net on Bottom Layer "NONET_L02_P001" (solid, pour order 1): 4065,3795 4230,3705 4425,3510 4435,2575 4185,2330 3920,2230 3565,2230 3420,2280 3235,2385 3120,2495 3030,2625 2970,2765 2930,2930 2925,3090 2955,3265 3035,3450 3090,3535 3185,3645 3430,3795

## Silkscreen, mask and mechanical layers (free items; w line width, h text height)
Top Overlay:
  drawing of 60 lines, arcs and shapes, not listed
Mechanical 1:
  circle w10: c3750,3035 r826.77

## Text inside footprints (layer, text, board x,y; h text height)
P2: Top Overlay "6" at 3980.04,3801.93 h20; Top Overlay "1" at 3490.28,3801.93 h20